# EAGLE board Plant Waterer (EAGLE 9.5.0)
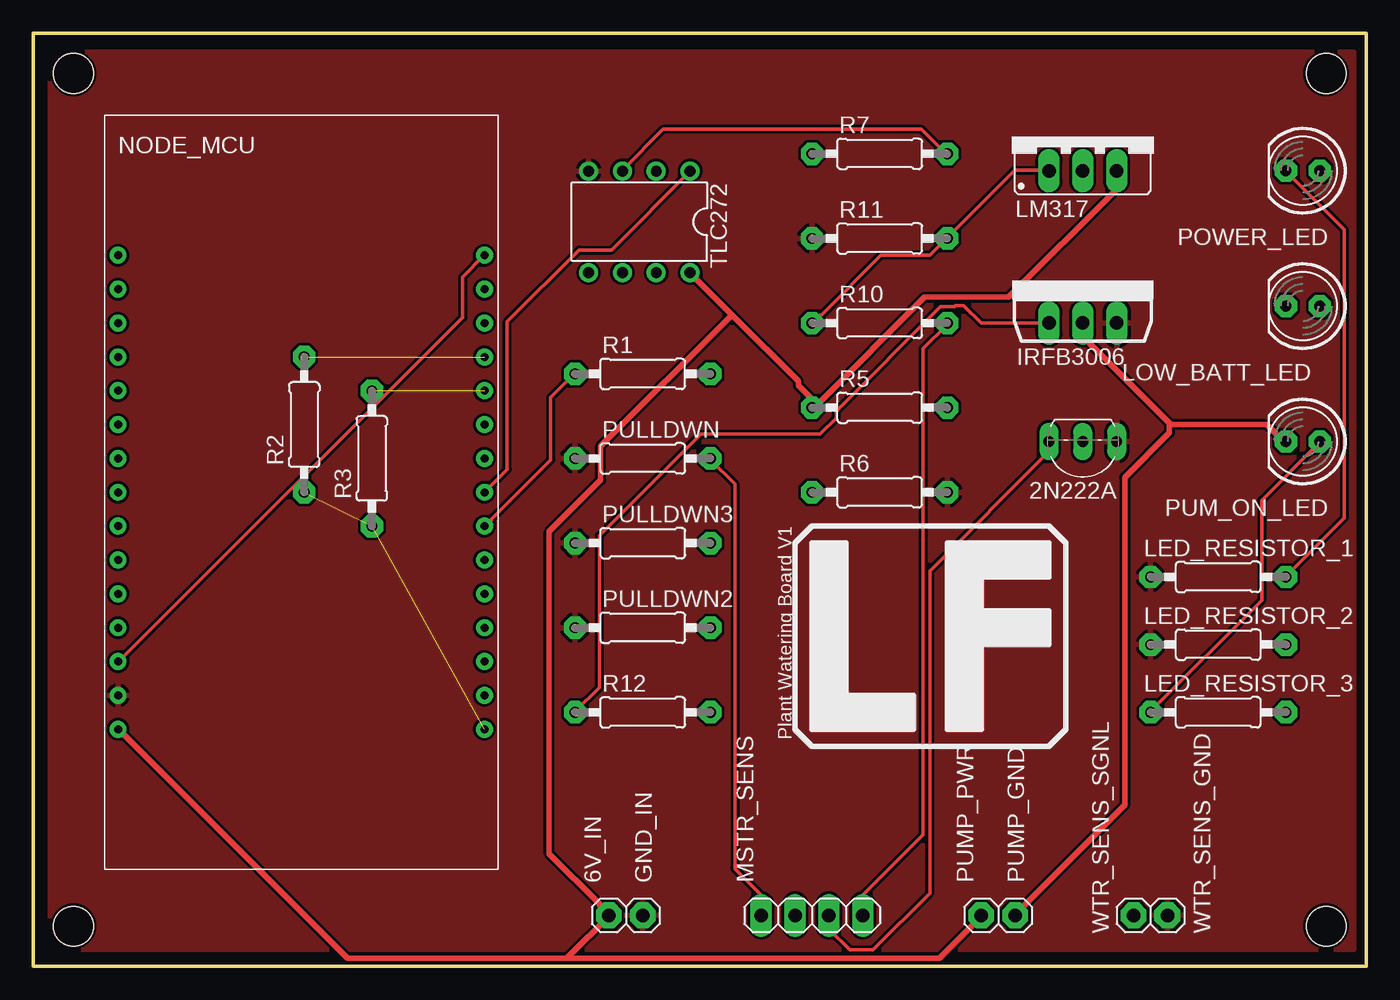
[diagram p0: board, top side]
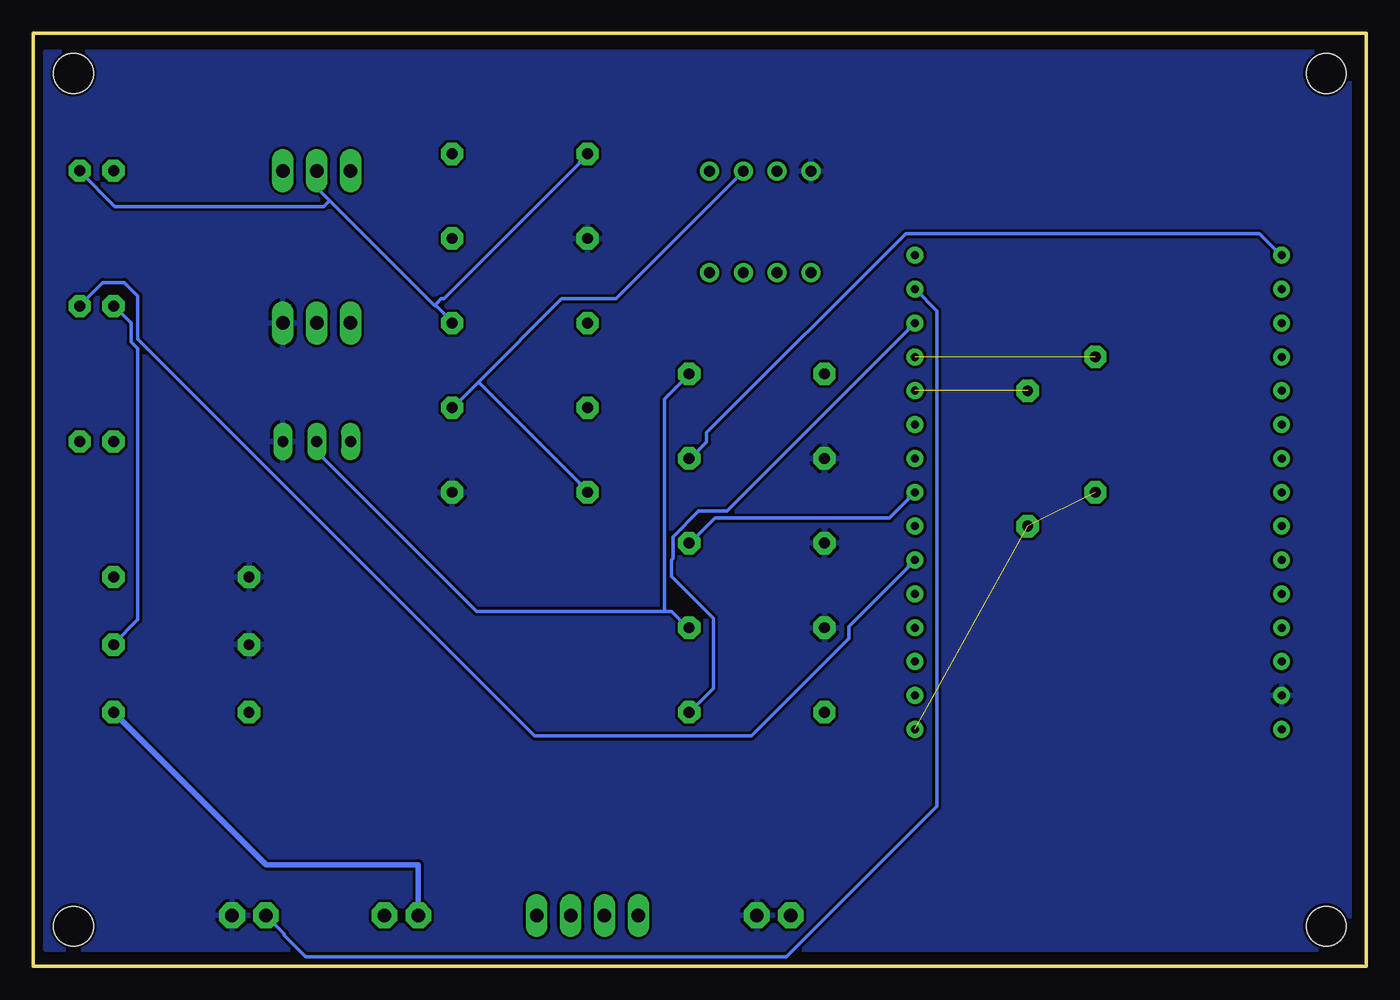
[diagram p1: board, bottom side, seen from below]

Size 100 x 70 mm. Coordinates in mm from the lower left corner, seen from the top.
Outline: 100,70 0,70 0,0 100,0 100,70
Copper layers (1*16): Top 0.035mm / dielectric 1.5mm / Bottom 0.035mm
Design rules "SparkFun": minimum track width 8mil, minimum drill 20mil, track to track 8mil, track to pad 8mil, pad to pad 8mil, via to via 8mil, smd to smd 8mil, copper to edge 8mil, drill to drill 8mil, minimum pad ring 12mil, minimum via ring 10mil, stop-mask expansion 4mil, vias tented up to drill 20mil, thermal gap 10mil
Net classes: 1 PWR: width 0.406 mm; 2 Signal: width 0.254 mm
Holes 3 mm at 97,67 3,67 3,3 97,3

## Footprints (pad centres in the part's own frame; a part is rotated, then mirrored left to right if it is on the bottom)
TO92-EBC-OVAL = drill 0.813 long: B 0,-1.27; C 2.54,-1.27; E -2.54,-1.27
1X01 = drill 1.016 pad 1.93 octagon: 1 0,0
TO262-V = drill 1.016 long: 1 -2.54,0; 2 0,0; 3 2.54,0
0207/10 = drill 0.813 pad 1.676 octagon: 1 -5.08,0; 2 5.08,0
317TS = drill 1.016 long: 1 -2.54,-2.54; 2 0,-2.54; 3 2.54,-2.54
LED5MM = drill 0.813 pad 1.676 octagon: A -1.27,0; K 1.27,0
1X04 = drill 1.016 long: 1 -3.81,0; 2 -1.27,0; 3 1.27,0; 4 3.81,0
NODEMCU_V3 = drill 0.6 pad 1.27: 3V 0,-25.4; 3V2 27.5,-12.7; 3V3 27.5,-35.56; A0 0,0; D0 27.5,0; D1 27.5,-2.54; D2 27.5,-5.08; D3 27.5,-7.62; D4 27.5,-10.16; D5 27.5,-17.78; D6 27.5,-20.32; D7 27.5,-22.86; D8 27.5,-25.4; EN 0,-27.94; GND 0,-33.02; GND1 0,-22.86; GND2 0,-2.54; GND3 27.5,-15.24; GND4 27.5,-33.02; RST 0,-30.48; RX 27.5,-27.94; S1 0,-12.7; S2 0,-10.16; S3 0,-7.62; SC 0,-15.24; SK 0,-20.32; SO 0,-17.78; TX 27.5,-30.48; VIN 0,-35.56; VV 0,-5.08
DIL08 = drill 0.813 pad 1.27: 1 -3.81,-3.81; 2 -1.27,-3.81; 3 1.27,-3.81; 4 3.81,-3.81; 5 3.81,3.81; 6 1.27,3.81; 7 -1.27,3.81; 8 -3.81,3.81

## Placement (x,y rotation side)
2N222A  2N2222  [TO92-EBC-OVAL]  78.74,38.1 180 top
6V_IN  [1X01]  43.18,3.81 0 top
GND_IN  [1X01]  45.72,3.81 0 top
IRFB3006  IRFB3006  [TO262-V]  78.74,48.26 0 top
LED_RESISTOR_1  2.2k  [0207/10]  88.9,29.21 0 top
LED_RESISTOR_2  2.2k  [0207/10]  88.9,24.13 0 top
LED_RESISTOR_3  2.2k  [0207/10]  88.9,19.05 0 top
LM317  [317TS]  78.74,62.23 0 top
LOW_BATT_LED  [LED5MM]  95.25,49.53 180 top
MSTR_SENS  [1X04]  58.42,3.81 0 top
NODE_MCU  NODEMCU_V3  [NODEMCU_V3]  6.35,53.34 0 top
POWER_LED  [LED5MM]  95.25,59.69 180 top
PULLDWN  10k  [0207/10]  45.72,38.1 0 top
PULLDWN2  10k  [0207/10]  45.72,25.4 0 top
PULLDWN3  10k  [0207/10]  45.72,31.75 0 top
PUM_ON_LED  [LED5MM]  95.25,39.37 180 top
PUMP_GND  [1X01]  73.66,3.81 0 top
PUMP_PWR  [1X01]  71.12,3.81 0 top
R1  320  [0207/10]  45.72,44.45 0 top
R2  4.7K  [0207/10]  20.32,40.64 90 top
R3  4.7K  [0207/10]  25.4,38.1 90 top
R5  680  [0207/10]  63.5,41.91 0 top
R6  820  [0207/10]  63.5,35.56 0 top
R7  1k  [0207/10]  63.5,60.96 0 top
R10  220  [0207/10]  63.5,48.26 0 top
R11  330  [0207/10]  63.5,54.61 0 top
R12  320  [0207/10]  45.72,19.05 0 top
TLC272  TLC272P  [DIL08]  45.47,55.85 180 top
WTR_SENS_GND  [1X01]  85.09,3.81 0 top
WTR_SENS_SGNL  [1X01]  82.55,3.81 0 top

## Library data of the parts
2N222A 6V_IN GND_IN LED_RESISTOR_1-LED_RESISTOR_3 LOW_BATT_LED POWER_LED PULLDWN PULLDWN2 PULLDWN3 PUM_ON_LED PUMP_GND PUMP_PWR R1-R3 R5-R7 R10-R12 WTR_SENS_GND WTR_SENS_SGNL = adafruit
IRFB3006 = transistor-power
LM317 = v-reg
MSTR_SENS = pinhead
NODE_MCU = My library
TLC272 = linear

## Nets
3.3_INTO_COMPARATOR [Signal]: R7.2 TLC272.3
3.3_REG [Signal]: LM317.2 MSTR_SENS.4 POWER_LED.A R7.1 R10.2
A0 [Signal]: MSTR_SENS.1 NODE_MCU.A0 PULLDWN.2
D0 [Signal]: NODE_MCU.D0 NODE_MCU.RST
D1 [Signal]: NODE_MCU.D1 WTR_SENS_SGNL.1
D2 [Signal]: NODE_MCU.D2 R12.2
D5 [Signal]: NODE_MCU.D5 PULLDWN3.2 TLC272.1
D6 [Signal]: NODE_MCU.D6 R1.1
D7 [Signal]: LOW_BATT_LED.A NODE_MCU.D7
GND [PWR]: 2N222A.E GND_IN.1 IRFB3006.3 LED_RESISTOR_1.1 LED_RESISTOR_2.1 NODE_MCU.GND PULLDWN2.1 PULLDWN3.1 PULLDWN.1 R6.2 R11.1 TLC272.4 WTR_SENS_GND.1
LED_PWR [Signal]: LED_RESISTOR_1.2 POWER_LED.K
LED_PWR2 [Signal]: LED_RESISTOR_2.2 LOW_BATT_LED.K
LED_PWR3 [Signal]: LED_RESISTOR_3.1 PUM_ON_LED.A
LM317_ADJ [Signal]: LM317.1 R10.1 R11.2
MOSFET_GATE [Signal]: IRFB3006.1 R12.1
N$1: NODE_MCU.D3 R2.2
N$2: NODE_MCU.D4 R3.2
N$3: NODE_MCU.3V3 R2.1 R3.1
PMP_GRD [PWR]: IRFB3006.2 PUM_ON_LED.K PUMP_GND.1
PWR_TO_MSTR_SENS [Signal]: 2N222A.C MSTR_SENS.3
SIGNL_INTO_2N222A [Signal]: 2N222A.B PULLDWN2.2 R1.2
VIN [PWR]: 6V_IN.1 LED_RESISTOR_3.2 LM317.3 NODE_MCU.VIN PUMP_PWR.1 R5.1 TLC272.8
VLTG_DIV_INTO_COMPARATOR [Signal]: R5.2 R6.1 TLC272.2

## Tracks (layer width: path | path; a pad name or v marks a point on that pad's centre or on a via)
3.3_INTO_COMPARATOR
  Top 0.254: R7.2 68.48,60.96 66.65,62.79 47.24,62.79 44.2,59.74 TLC272.3
3.3_REG
  Top 0.254: R10.2 68.58,48.16 66.75,46.33 66.75,9.86 62.28,5.38 62.28,3.86 MSTR_SENS.4
  Bottom 0.254: LM317.2 78.74,58.42 77.78,57.45 | 77.78,57.45 69.9,49.58 69.8,49.58 | 69.8,49.58 68.58,48.36 R10.2 | R7.1 59.03,60.35 59.03,60.25 69.19,50.09 69.39,50.09 69.8,49.68 69.8,49.58 | 77.78,57.45 78.23,57 93.88,57 96.52,59.64 POWER_LED.A
A0
  Top 0.254: PULLDWN.2 50.8,38 52.63,36.17 52.63,7.32 54.56,5.38 54.56,3.86 MSTR_SENS.1
  Bottom 0.254: PULLDWN.2 50.7,38.1 49.48,39.32 49.48,40.03 34.54,54.97 8.03,54.97 6.4,53.34 NODE_MCU.A0
D0
  Top 0.254: NODE_MCU.RST 6.4,22.86 32.21,48.67 32.21,51.71 33.83,53.34 NODE_MCU.D0
D1
  Bottom 0.254: WTR_SENS_SGNL.1 81.18,2.44 81.18,2.34 79.55,0.71 43.48,0.71 32.21,11.99 32.21,49.17 33.83,50.8 NODE_MCU.D1
D2
  Bottom 0.254: NODE_MCU.D2 33.93,48.26 34.34,47.85 34.34,47.75 47.95,34.14 50.09,34.14 52.02,32.21 52.02,30.58 52.12,30.48 52.12,29.26 48.97,26.11 48.97,20.83 50.8,19 R12.2
D5
  Top 0.254: TLC272.1 49.28,59.64 43.38,53.75 40.95,53.75 35.56,48.36 35.56,37.29 33.83,35.56 NODE_MCU.D5
  Bottom 0.254: NODE_MCU.D5 33.93,35.56 34.34,35.15 34.34,35.05 35.76,33.63 48.87,33.63 50.8,31.7 PULLDWN3.2
D6
  Top 0.254: NODE_MCU.D6 33.93,33.02 34.34,33.43 34.34,33.53 38.81,38 38.81,42.67 40.64,44.5 R1.1
D7
  Bottom 0.254: NODE_MCU.D7 33.93,30.48 34.34,30.07 34.34,29.97 38.81,25.5 38.81,24.59 46.13,17.27 62.38,17.27 92.15,47.04 92.15,50.29 93.17,51.31 94.79,51.31 96.52,49.58 LOW_BATT_LED.A
GND
  pour Bottom: 1.27,68.58 1.27,1.27 99.06,1.27 99.06,68.58
  pour Top: 1.27,68.58 1.27,1.27 99.06,1.27 99.06,68.58
LED_PWR
  Top 0.254: LED_RESISTOR_1.2 93.98,29.26 98.35,33.63 98.35,55.27 93.98,59.64 POWER_LED.K
LED_PWR2
  Bottom 0.254: LED_RESISTOR_2.2 93.98,24.18 92.15,26.01 92.15,46.33 92.66,46.84 92.66,48.26 93.98,49.58 LOW_BATT_LED.K
LED_PWR3
  Top 0.254: LED_RESISTOR_3.1 83.82,19.1 92.15,27.43 92.15,34.95 96.52,39.32 PUM_ON_LED.A
LM317_ADJ
  Top 0.254: LM317.1 76.2,59.74 73.66,59.74 68.58,54.66 R11.2 68.48,54.56 67.26,53.34 63.6,53.34 59.13,48.87 59.03,48.87 R10.1
MOSFET_GATE
  Top 0.254: IRFB3006.1 71.12,48.26 69.8,49.58 69.19,49.58 69.09,49.48 68.07,49.48 60.25,41.66 60.25,41.15 59.03,39.93 50.09,39.93 42.47,32.31 42.47,20.93 40.64,19.1 R12.1
N$1  (1 unrouted)
N$2  (1 unrouted)
N$3  (2 unrouted)
PMP_GRD
  Top 0.406: IRFB3006.2 78.74,47.24 85.34,40.64 | 85.34,40.64 92.56,40.64 93.78,39.42 93.98,39.42 PUM_ON_LED.K | PUMP_GND.1 73.66,3.86 81.89,12.09 81.89,36.68 85.24,40.03 85.24,40.54 85.34,40.64
PWR_TO_MSTR_SENS
  Top 0.254: 2N222A.C 76.2,38.61 67.26,29.67 67.26,5.49 62.99,1.22 61.27,1.22 59.74,2.74 59.74,3.76 MSTR_SENS.3
SIGNL_INTO_2N222A
  Bottom 0.254: 2N222A.B 78.74,38.61 66.75,26.62 52.63,26.62 | 52.63,26.62 52.12,26.62 50.9,25.4 PULLDWN2.2 | 52.63,26.62 52.63,42.57 50.8,44.4 R1.2
VIN
  Top 0.406: 52.43,48.87 57.4,43.89 57.4,43.59 58.42,42.57 R5.1 58.52,42.27 58.93,42.27 66.85,50.19 73.15,50.19 81.28,58.32 LM317.3 | 52.43,48.87 49.28,52.02 TLC272.8 | 40.13,0.71 43.18,3.76 6V_IN.1 43.08,3.96 42.47,4.57 42.47,4.67 38.71,8.43 38.71,32.61 42.57,36.47 42.57,39.01 52.43,48.87 | 40.13,0.71 40.03,0.61 23.57,0.61 6.4,17.78 NODE_MCU.VIN | PUMP_PWR.1 71.12,3.76 67.97,0.61 40.23,0.61 40.13,0.71
  Bottom 0.406: LED_RESISTOR_3.2 82.55,7.62 71.12,7.62 PUMP_PWR.1
VLTG_DIV_INTO_COMPARATOR
  Bottom 0.254: 66.6,43.84 68.58,41.86 R5.2 | 66.6,43.84 60.35,50.09 56.29,50.09 46.74,59.64 TLC272.2 | R6.1 59.03,36.17 59.03,36.27 66.6,43.84

## Text on the board
tPlace: Plant Watering Board V1